# Altium PCB MAGI'sPrototypeBoard.PcbDoc (part 2 of 3)
Units mil, origin at the board's own origin, x right, y up, seen from the top; angles counter-clockwise.
Board outline 6000 x 4000 mil, 2 copper layers (Top Layer, Bottom Layer); 30 components, 124 nets, 1722 pads, 44 vias.
Unrouted connection lines stored in the file: 29.
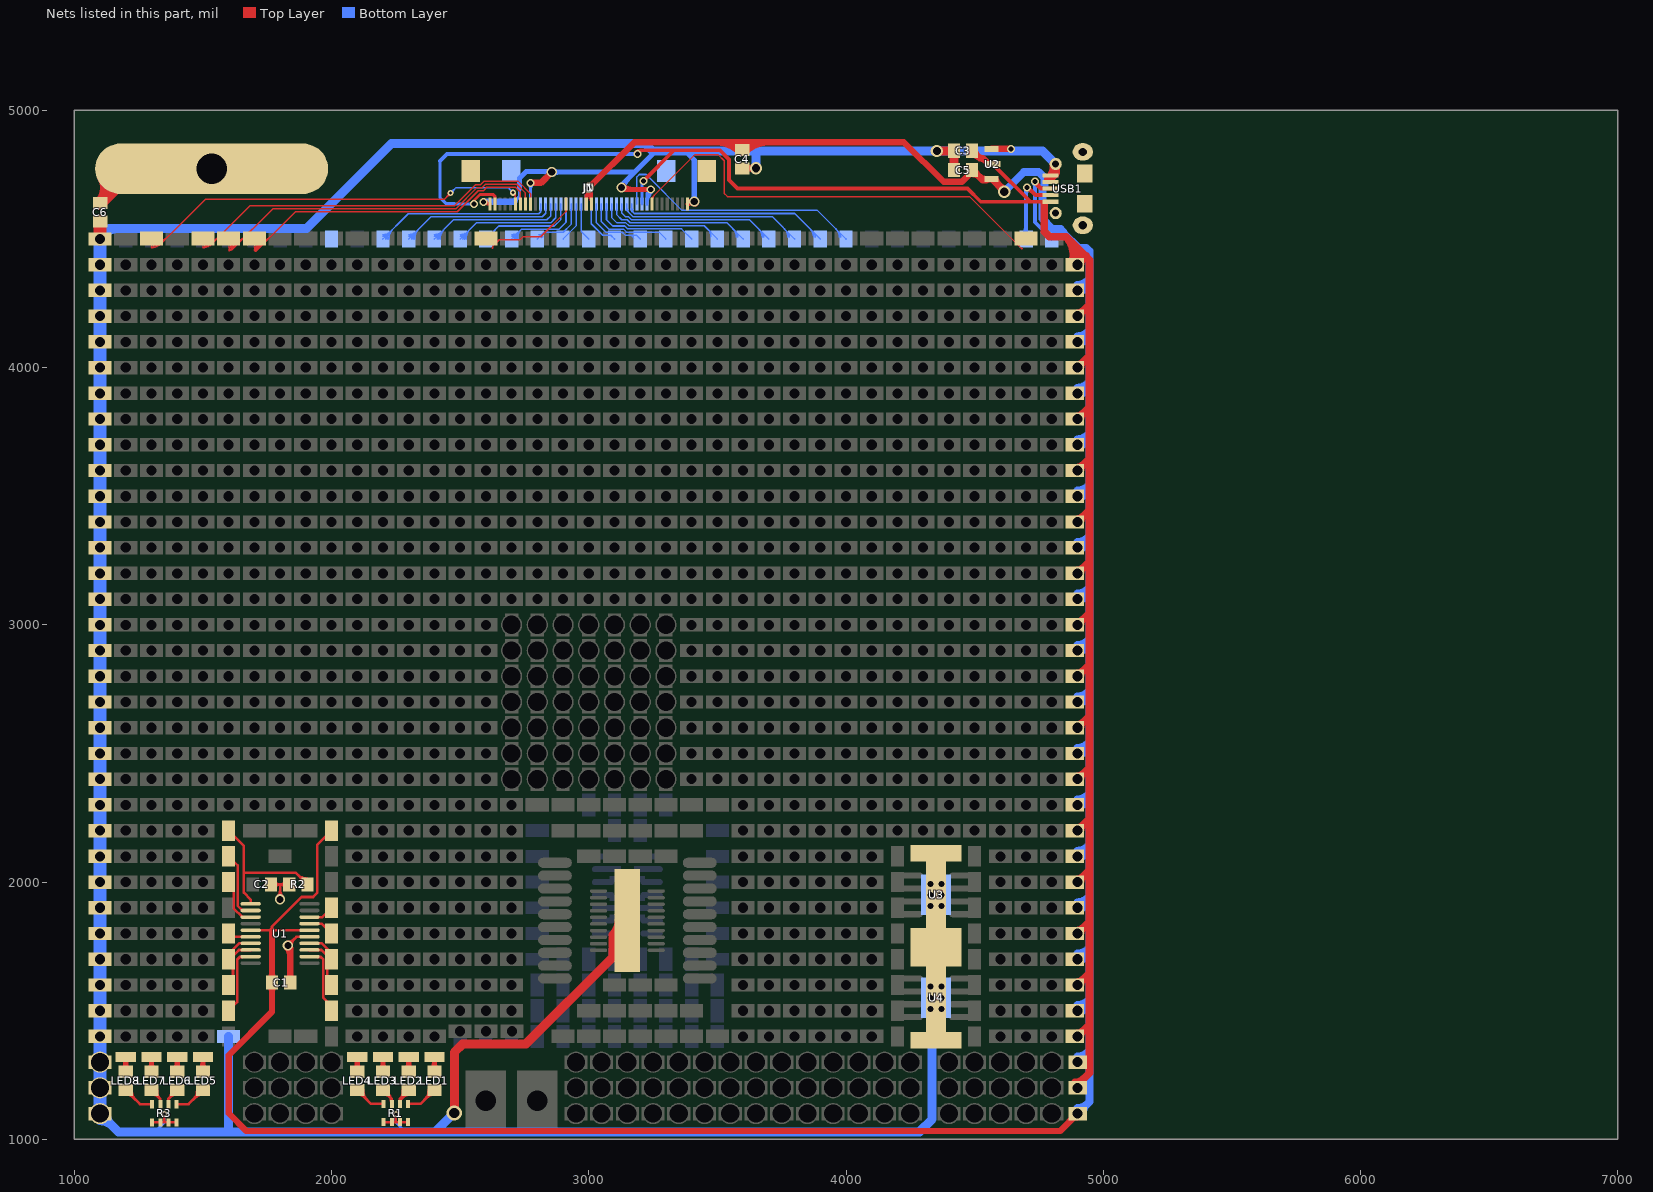
[diagram p2: the nets of this part, all layers, seen from the top]

## Via types
v1: diameter 35.43, hole 23.62, Top Layer to Bottom Layer, tented both sides, 12 vias
v2: diameter 31.5, hole 19.68, Top Layer to Bottom Layer, tented both sides, 9 vias
v3: diameter 24, hole 12, Top Layer to Bottom Layer, tented both sides, 6 vias
v4: diameter 39.37, hole 27.56, Top Layer to Bottom Layer, tented both sides, 6 vias
v5: diameter 59.06, hole 39.37, Top Layer to Bottom Layer, tented both sides, 5 vias
v6: diameter 47.24, hole 39.37, Top Layer to Bottom Layer, 3 vias
v7: diameter 47.24, hole 31.5, Top Layer to Bottom Layer, tented both sides, 3 vias

## Nets (pads, with @x,y where several pads share a name; then routed paths per layer and width w, separated by ;. In a path a pad name is that pad's centre, name@x,y a point inside that pad or via, vN(x,y) a via of type N, cw(c..) or ccw(c..) an arc to the next point about the centre after c; other vN are vias at no path point)
3.3V: C1.1 C4.1 C5.1 J1.20 J1.21 JN.12 pad.40@2000,2200 pad.62@4900,1100 pad.62@4900,1300 pad.63@4900,2500 pad.65@4900,2300 pad.65@4900,4300 pad.67@4900,2100 pad.67@4900,4100 pad.69@4900,1900 pad.69@4900,3900 pad.72@4900,1700 pad.72@4900,3700 pad.74@4900,1500 pad.74@4900,3500 pad.77@4900,3300 pad.78@4900,2700 pad.78@4900,2900 pad.78@4900,3100 U1.5 U1.16 U2.3 | length 14374.1
  Top Layer w10: U1.5@1685.83,1812.8 1742.2,1812.8 1743,1812 1768.5,1812 ; 1768.5,1810 1768.5,1812 ; U1.16@1914.17,1812.8 1913.38,1812 1768.5,1812 ; 1965.86,2165.86 cw(c2000,2131.72) pad.40@2000,2180 ; pad.40@2000,2200 1944,2144 1944,1957.78 1928.22,1942 1883.24,1942 1768.5,1827.27 1768.5,1812
  Top Layer w12: J1.21@2990.16,4636.02 v4@2990.16,4689.16 ; J1.21@2990.16,4642.2 cw(c3056.8,4642.2) v4@3009.68,4689.32 ; 2990.16,4671.17 cw(c3027.83,4671.17) v4@3001.19,4697.81 ; v4@2990.32,4689.32 cw(c2943.2,4642.2) J1.20@3009.84,4642.2 ; v4@2998.81,4697.81 cw(c2972.17,4671.17) 3009.84,4671.17 ; v4(3000,4699) 3009.84,4689.16 J1.20@3009.84,4636.02
  Top Layer w25: C1.1@1760.64,1597.25 cw(c1741.65,1578.27) 1768.5,1578.27 cw(c1795.35,1578.27) C1.1@1776.37,1597.25 ; C1.1@1760.64,1620.86 ccw(c1741.65,1639.84) 1768.5,1639.84 ccw(c1795.35,1639.84) C1.1@1776.37,1620.86 ; 1768.5,1810 C1.1@1768.5,1609.06 1768.5,1495.44 1600,1326.94 1600,1101.32 1669,1032.32 4832.32,1032.32 v6(4900,1100) ; v4(3000,4699) 3177.5,4876.5 4225.07,4876.5 4379.63,4721.94 4450.85,4721.94 4490.43,4761.52 C5.1@4490.43,4768 4526,4732.43 ; 3491.21,4876.5 cw(c3491.21,4743.58) C4.1@3585.2,4837.57 ; 3551.57,4876.5 cw(c3551.57,4803.94) C4.1@3602.88,4855.25 ; C4.1@3591.12,4855.25 cw(c3642.43,4803.94) 3642.43,4876.5 ; C4.1@3608.8,4837.57 cw(c3702.79,4743.58) 3702.79,4876.5 ; C5.1@4469.65,4740.74 ccw(c4446.33,4764.06) C5.1@4479.31,4764.06 ; C5.1@4490.43,4752.94 cw(c4490.43,4716.59) 4516.14,4742.29 ; C5.1@4501.18,4766.94 ccw(c4539.47,4777.2) 4519.65,4742.87 ; C5.1@4509.99,4748.44 ccw(c4550.31,4788.76) U2.3@4550.31,4731.74 ; U2.3@4550.77,4731.93 cw(c4538.65,4745.08) 4526,4732.43 ; U2.3@4581.05,4732.59 ccw(c4647.1,4759.37) v7@4619.33,4693.73 ; U2.3@4581.11,4732.43 ccw(c4617.47,4732.43) 4591.76,4706.73 ; 4586.34,4719.54 ccw(c4624.68,4735.08) v7@4617.05,4694.42 ; v7@4603.88,4683.49 ccw(c4577.03,4683.49) 4596.01,4702.47 ccw(c4615,4721.46) v7@4615,4694.61 ; v7@4615,4679 v7(4615,4683.49) U2.3@4566.06,4732.43 4526,4732.43 ; pad.62@4886.5,1100 cw(c4853.91,1100) 4876.95,1076.95 cw(c4900,1053.91) pad.62@4900,1086.5 ; pad.62@4888.88,1100 cw(c4862.03,1100) 4881.01,1081.01 cw(c4900,1062.03) pad.62@4900,1088.88 ; 4595.57,4702.86 ccw(c4615.29,4722.29) 4615.08,4694.61 cw(c4615.29,4722.29) 4595.57,4702.86 ; 4596.39,4702.03 cw(c4577.86,4683.76) 4603.88,4683.57 ccw(c4577.86,4683.76) 4596.39,4702.03
  Bottom Layer w12: JN.12@2990.16,4636.02 2990.16,4689.16 v4(3000,4699)
  Bottom Layer w30: v7(4615,4683.49) 4691.51,4760 4748,4760 4748.25,4759.75 4750.22,4759.75 4771.75,4738.22 4771.75,4707.78 4763.5,4699.53 4763.5,4579.5 4804.5,4538.5 4834.7,4538.5 4847,4526.2 4847,4522.66 4903.66,4466 4934,4466 4947,4453 4947,4346.3 ; v6(4900,1100) 4900.7,1100 4947,1146.3 4947,1346.3 ; pad.62@4900,1122 ccw(c4900,1176.8) 4938.75,1138.05 ; v6(4900,1300) 4900.7,1300 4947,1346.3 ; pad.62@4900,1322 ccw(c4900,1376.8) 4938.75,1338.05 ; pad.74@4900,1500 4900.7,1500 4947,1546.3 ; pad.74@4900,1522 ccw(c4900,1576.8) 4938.75,1538.05 ; pad.72@4900,1700 4900.7,1700 4947,1746.3 ; pad.72@4900,1722 ccw(c4900,1776.8) 4938.75,1738.05 ; pad.69@4900,1900 4900.7,1900 4947,1946.3 ; pad.69@4900,1922 ccw(c4900,1976.8) 4938.75,1938.05 ; pad.67@4900,2100 4900.7,2100 4947,2146.3 ; pad.67@4900,2122 ccw(c4900,2176.8) 4938.75,2138.05 ; pad.65@4900,2300 4900.7,2300 4947,2346.3 ; pad.65@4900,2322 ccw(c4900,2376.8) 4938.75,2338.05 ; pad.63@4900,2500 4900.7,2500 4947,2546.3 ; pad.63@4900,2522 ccw(c4900,2576.8) 4938.75,2538.05 ; pad.78@4900,2700 4900.7,2700 4947,2746.3 ; pad.78@4900,2722 ccw(c4900,2776.8) 4938.75,2738.05 ; pad.78@4900,2900 4900.7,2900 4947,2946.3 ; pad.78@4900,2922 ccw(c4900,2976.8) 4938.75,2938.05 ; pad.78@4900,3100 4900.7,3100 4947,3146.3 ; pad.78@4900,3122 ccw(c4900,3176.8) 4938.75,3138.05 ; pad.77@4900,3300 4900.7,3300 4947,3346.3 ; pad.77@4900,3322 ccw(c4900,3376.8) 4938.75,3338.05 ; pad.74@4900,3500 4900.7,3500 4947,3546.3 ; pad.74@4900,3522 ccw(c4900,3576.8) 4938.75,3538.05 ; pad.72@4900,3700 4900.7,3700 4947,3746.3 ; pad.72@4900,3722 ccw(c4900,3776.8) 4938.75,3738.05 ; pad.69@4900,3900 4900.7,3900 4947,3946.3 ; pad.69@4900,3922 ccw(c4900,3976.8) 4938.75,3938.05 ; pad.67@4900,4100 4900.7,4100 4947,4146.3 ; pad.67@4900,4122 ccw(c4900,4176.8) 4938.75,4138.05 ; pad.65@4900,4300 4900.7,4300 4947,4346.3 ; pad.65@4900,4322 ccw(c4900,4376.8) 4938.75,4338.05 ; pad.62@4921,1101 cw(c4967.6,1101) pad.62@4934.65,1133.95 ; pad.62@4921,1301 cw(c4967.6,1301) pad.62@4934.65,1333.95 ; pad.74@4921,1501 cw(c4967.6,1501) 4934.65,1533.95 ; pad.72@4921,1701 cw(c4967.6,1701) 4934.65,1733.95 ; pad.69@4921,1901 cw(c4967.6,1901) 4934.65,1933.95 ; pad.67@4921,2101 cw(c4967.6,2101) 4934.65,2133.95 ; pad.65@4921,2301 cw(c4967.6,2301) 4934.65,2333.95 ; pad.63@4921,2501 cw(c4967.6,2501) 4934.65,2533.95 ; pad.78@4921,2701 cw(c4967.6,2701) 4934.65,2733.95 ; pad.78@4921,2901 cw(c4967.6,2901) 4934.65,2933.95 ; pad.78@4921,3101 cw(c4967.6,3101) 4934.65,3133.95 ; pad.77@4921,3301 cw(c4967.6,3301) 4934.65,3333.95 ; pad.74@4921,3501 cw(c4967.6,3501) 4934.65,3533.95 ; pad.72@4921,3701 cw(c4967.6,3701) 4934.65,3733.95 ; pad.69@4921,3901 cw(c4967.6,3901) 4934.65,3933.95 ; pad.67@4921,4101 cw(c4967.6,4101) 4934.65,4133.95 ; pad.65@4921,4301 cw(c4967.6,4301) 4934.65,4333.95 ; 4947,1346.3 4947,1546.3 ; 4947,1546.3 4947,1746.3 ; 4947,1746.3 4947,1946.3 ; 4947,1946.3 4947,2146.3 ; 4947,2146.3 4947,2346.3 ; 4947,2346.3 4947,2546.3 ; 4947,2546.3 4947,2746.3 ; 4947,2746.3 4947,2946.3 ; 4947,2946.3 4947,3146.3 ; 4947,3146.3 4947,3346.3 ; 4947,3346.3 4947,3546.3 ; 4947,3546.3 4947,3746.3 ; 4947,3746.3 4947,3946.3 ; 4947,3946.3 4947,4146.3 ; 4947,4146.3 4947,4346.3
5V: C3.1 J1.39 JN.23 pad.62@4900,1200 pad.62@4900,2600 pad.64@4900,2400 pad.64@4900,4400 pad.66@4900,2200 pad.66@4900,4200 pad.68@4900,2000 pad.68@4900,4000 pad.70@4900,1800 pad.70@4900,3800 pad.73@4900,1600 pad.73@4900,3600 pad.75@4900,1400 pad.75@4900,3400 pad.76@4900,3000 pad.76@4900,3200 pad.78@4900,2800 U2.2 USB1.1 | length 9169
  Top Layer w12: v2@2542.11,4637.89 2576.88,4672.67 2596.65,4672.67 2597.6,4673.61 2627.02,4673.61 2635.83,4664.81 J1.39@2635.83,4636.02
  Top Layer w15: v2@3184.23,4835.77 cw(c3205.98,4814.02) 3205.98,4844.78 ; 3202.78,4844.78 3331.78,4844.78 ; v2(3213,4726) 3331.78,4844.78 ; U2.2@4569.99,4791.49 4716.66,4644.82 ; U2.2@4578.99,4791.49 ccw(c4600.71,4791.49) 4585.35,4776.13 ; USB1.1@4817.48,4644.82 USB1.1@4794.48,4644.82 4716.66,4644.82 ; 3331.78,4844.78 3509.63,4844.78 3545.8,4808.6 3545.8,4729 3578.86,4695.94 4472.62,4695.94 4523.74,4644.82 4716.66,4644.82
  Top Layer w25: C3.1@4490.43,4827.94 cw(c4490.43,4791.59) 4516.14,4817.29 ; C3.1@4490.43,4843 4519.37,4814.06 4532.56,4814.06 ; C3.1@4501.43,4840.76 ccw(c4532.55,4845.55) 4532.55,4814.06 ; 4519.38,4814.06 cw(c4519.38,4780.57) U2.2@4550.96,4791.72 ; U2.2@4569.99,4791.49 4555.13,4791.49 4532.56,4814.06
  Top Layer w30: USB1.1@4770.53,4638 4770.53,4528.97 4791,4508.5 4855.5,4508.5 ; pad.64@4879.47,4413.17 ccw(c4787.81,4440.8) 4855.5,4508.5 ; pad.62@4890,1221 ccw(c4890,1267.26) 4922.71,1234.55 ; 4890.96,4473.04 cw(c4842.31,4424.38) pad.64@4908.19,4404.52 ; v6(4900,1200) 4900,1211.84 4947,1258.84 4947,1447 ; pad.75@4900,1400 4947,1447 ; pad.75@4900,1411 ccw(c4900,1437.56) 4918.78,1418.78 ccw(c4937.56,1400) pad.75@4911,1400 ; pad.73@4900,1600 4947,1647 ; pad.73@4900,1611 ccw(c4900,1637.56) 4918.78,1618.78 ccw(c4937.56,1600) pad.73@4911,1600 ; pad.70@4900,1800 4947,1847 ; pad.70@4900,1811 ccw(c4900,1837.56) 4918.78,1818.78 ccw(c4937.56,1800) pad.70@4911,1800 ; pad.68@4900,2000 4947,2047 ; pad.68@4900,2011 ccw(c4900,2037.56) 4918.78,2018.78 ccw(c4937.56,2000) pad.68@4911,2000 ; pad.66@4900,2200 4947,2247 ; pad.66@4900,2211 ccw(c4900,2237.56) 4918.78,2218.78 ccw(c4937.56,2200) pad.66@4911,2200 ; pad.64@4900,2400 4947,2447 ; pad.64@4900,2411 ccw(c4900,2437.56) 4918.78,2418.78 ccw(c4937.56,2400) pad.64@4911,2400 ; pad.62@4900,2600 4947,2647 ; pad.62@4900,2611 ccw(c4900,2637.56) 4918.78,2618.78 ccw(c4937.56,2600) pad.62@4911,2600 ; pad.78@4900,2800 4947,2847 ; pad.78@4900,2811 ccw(c4900,2837.56) 4918.78,2818.78 ccw(c4937.56,2800) pad.78@4911,2800 ; pad.76@4900,3000 4947,3047 ; pad.76@4900,3011 ccw(c4900,3037.56) 4918.78,3018.78 ccw(c4937.56,3000) pad.76@4911,3000 ; pad.76@4900,3200 4947,3247 ; pad.76@4900,3211 ccw(c4900,3237.56) 4918.78,3218.78 ccw(c4937.56,3200) pad.76@4911,3200 ; pad.75@4900,3400 4947,3447 ; pad.75@4900,3411 ccw(c4900,3437.56) 4918.78,3418.78 ccw(c4937.56,3400) pad.75@4911,3400 ; pad.73@4900,3600 4947,3647 ; pad.73@4900,3611 ccw(c4900,3637.56) 4918.78,3618.78 ccw(c4937.56,3600) pad.73@4911,3600 ; pad.70@4900,3800 4947,3847 ; pad.70@4900,3811 ccw(c4900,3837.56) 4918.78,3818.78 ccw(c4937.56,3800) pad.70@4911,3800 ; pad.68@4900,4000 4947,4047 ; pad.68@4900,4011 ccw(c4900,4037.56) 4918.78,4018.78 ccw(c4937.56,4000) pad.68@4911,4000 ; pad.66@4900,4200 4947,4247 ; pad.66@4900,4211 ccw(c4900,4237.56) 4918.78,4218.78 ccw(c4937.56,4200) pad.66@4911,4200 ; pad.64@4900,4400 4934.09,4434.09 ; pad.64@4900,4411 ccw(c4900,4437.56) 4918.78,4418.78 ccw(c4937.56,4400) pad.64@4911,4400 ; 4855.5,4508.5 4947,4417 4947,4247 ; 4947,1447 4947,1647 ; 4947,1647 4947,1847 ; 4947,1847 4947,2047 ; 4947,2047 4947,2247 ; 4947,2247 4947,2447 ; 4947,2447 4947,2647 ; 4947,2647 4947,2847 ; 4947,2847 4947,3047 ; 4947,3047 4947,3247 ; 4947,3247 4947,3447 ; 4947,3447 4947,3647 ; 4947,3647 4947,3847 ; 4947,3847 4947,4047 ; 4947,4047 4947,4247
  Bottom Layer w12: 2421,4803 2421,4661.6 2445.6,4637 2478.6,4637 2479.6,4636 v2(2554,4636) ; JN.23@3206.69,4636.02 3206.69,4719.69 v2(3213,4726)
  Bottom Layer w15: 2421,4803 2449,4831 v2(3189,4831)
A0: JN.7 pad.44 pad.62@2600,4500 U1.14 | length 669.3
  Top Layer w10: U1.14@1914.17,1761.61 1962.39,1761.61 2000,1724 pad.44@2000,1700
  Bottom Layer w6: pad.62@2600,4500 2650.5,4550.5 2866,4550.5 2891.73,4576.23 JN.7@2891.73,4636.02 ; pad.62@2600,4511 ccw(c2600,4537.56) 2618.78,4518.78 ccw(c2637.56,4500) pad.62@2611,4500 ; pad.62@2600,4517 ccw(c2600,4558.04) 2629.02,4529.02 ccw(c2658.04,4500) pad.62@2617,4500 ; pad.62@2623,4500 cw(c2678.53,4500) 2639.26,4539.26 ; JN.7@2889.68,4614.28 cw(c2884.72,4609.32) 2891.73,4609.32 cw(c2898.75,4609.32) JN.7@2893.79,4614.28
A1: JN.6 pad.62@2500,4500 | length 620.5
  Bottom Layer w6: pad.62@2500,4500 2562.5,4562.5 2852,4562.5 2872.05,4582.55 JN.6@2872.05,4636.02 ; pad.62@2500,4511 ccw(c2500,4537.56) 2518.78,4518.78 ccw(c2537.56,4500) pad.62@2511,4500 ; pad.62@2500,4517 ccw(c2500,4558.04) 2529.02,4529.02 ccw(c2558.04,4500) pad.62@2517,4500 ; pad.62@2523,4500 cw(c2578.53,4500) 2539.26,4539.26 ; JN.6@2869.99,4614.28 cw(c2865.03,4609.32) 2872.05,4609.32 cw(c2879.06,4609.32) JN.6@2874.1,4614.28
A2: JN.5 pad.62@2400,4500 | length 696.6
  Bottom Layer w6: pad.62@2400,4500 2474.5,4574.5 2837,4574.5 2852.36,4589.86 JN.5@2852.36,4636.02 ; pad.62@2400,4511 ccw(c2400,4537.56) 2418.78,4518.78 ccw(c2437.56,4500) pad.62@2411,4500 ; pad.62@2400,4517 ccw(c2400,4558.04) 2429.02,4529.02 ccw(c2458.04,4500) pad.62@2417,4500 ; pad.62@2423,4500 cw(c2478.53,4500) 2439.26,4539.26 ; JN.5@2850.31,4614.28 cw(c2845.35,4609.32) 2852.36,4609.32 cw(c2859.38,4609.32) JN.5@2854.42,4614.28
A3: pad.62@2000,4500
A4: JN.4 pad.42 pad.62@2300,4500 U1.18 | length 909.5
  Top Layer w10: U1.18@1914.17,1863.98 1963.98,1863.98 pad.42@2000,1900 ; 1965.86,1865.86 cw(c2000,1831.72) pad.42@2000,1880
  Bottom Layer w6: pad.62@2300,4500 2386.5,4586.5 2819,4586.5 2832.68,4600.18 JN.4@2832.68,4636.02 ; pad.62@2300,4511 ccw(c2300,4537.56) 2318.78,4518.78 ccw(c2337.56,4500) pad.62@2311,4500 ; pad.62@2300,4517 ccw(c2300,4558.04) 2329.02,4529.02 ccw(c2358.04,4500) pad.62@2317,4500 ; pad.62@2323,4500 cw(c2378.53,4500) 2339.26,4539.26 ; JN.4@2830.62,4614.28 cw(c2825.66,4609.32) 2832.68,4609.32 cw(c2839.69,4609.32) JN.4@2834.73,4614.28
A5: JN.3 pad.43 pad.62@2200,4500 U1.17 | length 987.7
  Top Layer w10: U1.17@1914.17,1838.39 1961.61,1838.39 pad.43@2000,1800 ; 1965.86,1834.14 ccw(c2000,1868.28) pad.43@2000,1820
  Bottom Layer w6: pad.62@2200,4500 2298.5,4598.5 2806,4598.5 2812.99,4605.49 JN.3@2812.99,4636.02 ; pad.62@2200,4511 ccw(c2200,4537.56) 2218.78,4518.78 ccw(c2237.56,4500) pad.62@2211,4500 ; pad.62@2200,4517 ccw(c2200,4558.04) 2229.02,4529.02 ccw(c2258.04,4500) pad.62@2217,4500 ; pad.62@2223,4500 cw(c2278.53,4500) 2239.26,4539.26 ; JN.3@2810.94,4614.28 cw(c2805.98,4609.32) 2812.99,4609.32 cw(c2820.01,4609.32) JN.3@2815.05,4614.28
A6: 
BOOT0: J1.35 pad.31 pad.62@1300,4502 R2.2 U1.1 | length 2558.7
  Top Layer w6: 1300,4466.5 ccw(c1300,4517.86) pad.62@1336.31,4481.54 ; 1300,4472.5 ccw(c1300,4538.34) 1346.56,4491.78 ; pad.62@1300,4478.5 ccw(c1300,4558.83) 1356.8,4502.03 ; pad.62@1300,4484.5 ccw(c1300,4579.31) 1367.04,4512.27 ; pad.62@1327,4475 1327,4476 1330.77,4476 1508.77,4654 2438,4654 v3(2463,4679) ; v3@2454,4679 cw(c2432.27,4679) 2447.64,4663.64 cw(c2463,4648.27) v3@2463,4670 ; v3(2706,4680) 2714.57,4671.43 ; v3@2710.25,4672.07 cw(c2711.98,4668.84) 2714.57,4671.43 ; J1.35@2712.51,4657.76 ccw(c2707.55,4662.72) 2714.57,4662.72 ccw(c2721.58,4662.72) J1.35@2716.62,4657.76 ; v3@2713.93,4675.75 ccw(c2717.16,4674.02) 2714.57,4671.43 ; J1.35@2714.57,4636.02 2714.57,4671.43
  Top Layer w10: pad.31@1600,2200 1659.08,2140.92 1659.08,2039 ; U1.1@1685.83,1915.16 1685.83,1932.08 1659.08,1958.83 1659.08,2036 1861.24,2036 R2.2@1906.3,1990.94 ; 1867.79,2029.46 ccw(c1906.3,2067.97) R2.2@1906.3,2013.5 ; 1877.29,2019.95 cw(c1852.22,1994.88) R2.2@1887.68,1994.88 ; R2.2@1884.86,2012.38 ccw(c1906.3,2033.82) R2.2@1906.3,2003.5
  Bottom Layer w6: v3(2463,4679) 2484,4700 2686,4700 v3(2706,4680) ; v3@2463,4688 ccw(c2463,4709.73) 2478.36,4694.36 ccw(c2493.73,4679) v3@2472,4679 ; v3@2697,4680 ccw(c2675.27,4680) 2690.64,4695.36 ccw(c2706,4710.73) v3@2706,4689
D0: JN.22 pad.38 pad.62@4000,4500 U1.9 | length 1390.5
  Top Layer w10: pad.38@1600,1500 1633,1533 1633,1699 1644.43,1710.43 U1.9@1685.83,1710.43 ; 1634.9,1700.9 cw(c1653.35,1682.46) U1.9@1653.35,1708.54
  Bottom Layer w6: JN.22@3184.95,4657.76 ccw(c3179.99,4662.72) 3187.01,4662.72 ccw(c3194.02,4662.72) JN.22@3189.06,4657.76 ; JN.22@3187.01,4636.02 3187.01,4741.27 3196.48,4750.75 3223.25,4750.75 3237.75,4736.25 3237.75,4735.94 3362.69,4611 3889,4611 pad.62@4000,4500 ; 3960.21,4539.79 cw(c3926.92,4506.5) pad.62@3974,4506.5 ; 3970.45,4529.55 cw(c3947.41,4506.5) pad.62@3980,4506.5
D1: JN.21 pad.37 pad.62@3900,4500 U1.8 | length 1106.1
  Top Layer w10: pad.37@1600,1600 1617,1617 1617,1713 1640.02,1736.02 U1.8@1685.83,1736.02
  Bottom Layer w6: JN.21@3164.25,4616.73 ccw(c3175.05,4615.37) 3167.36,4607.67 ; JN.21@3165.27,4614.28 cw(c3160.31,4609.32) 3167.32,4609.32 cw(c3174.34,4609.32) JN.21@3169.38,4614.28 ; JN.21@3167.32,4636.02 3167.32,4607.7 3176.02,4599 ; JN.21@3170.2,4615.98 ccw(c3190.45,4613.43) 3176.02,4599 ; 3860.21,4539.79 cw(c3826.92,4506.5) pad.62@3874,4506.5 ; 3870.45,4529.55 cw(c3847.41,4506.5) pad.62@3880,4506.5 ; pad.62@3900,4500 3801,4599 3176.02,4599
D2: JN.20 pad.36 pad.62@3800,4500 U1.7 | length 935
  Top Layer w10: pad.36@1600,1700 1600,1721 1640.61,1761.61 U1.7@1685.83,1761.61
  Bottom Layer w6: JN.20@3145.86,4614.04 cw(c3143.05,4610.41) 3147.64,4610.41 ; JN.20@3147.64,4636.02 3147.64,4610.41 ; JN.20@3149.42,4614.04 ccw(c3152.22,4610.41) 3147.64,4610.41 ; JN.20@3150.54,4616.34 ccw(c3171.86,4616.34) 3156.79,4601.26 ; 3760.21,4539.79 cw(c3726.92,4506.5) pad.62@3774,4506.5 ; 3770.45,4529.55 cw(c3747.41,4506.5) pad.62@3780,4506.5 ; pad.62@3800,4500 3713,4587 3171.05,4587 3147.64,4610.41
D3: JN.19 pad.35 pad.62@3700,4500 U1.6 | length 813.6
  Top Layer w10: pad.35@1600,1800 1612.8,1787.2 U1.6@1685.83,1787.2
  Bottom Layer w6: JN.19@3125.9,4614.28 cw(c3120.94,4609.32) 3127.95,4609.32 cw(c3134.97,4609.32) JN.19@3130.01,4614.28 ; JN.19@3127.95,4636.02 3127.95,4601.05 3142.5,4586.5 3154.58,4586.5 3166.08,4575 3625,4575 pad.62@3700,4500 ; 3660.21,4539.79 cw(c3626.92,4506.5) pad.62@3674,4506.5 ; 3670.45,4529.55 cw(c3647.41,4506.5) pad.62@3680,4506.5
D4: JN.18 pad.62@3600,4500 | length 645.9
  Bottom Layer w6: JN.18@3106.21,4614.28 cw(c3101.25,4609.32) 3108.27,4609.32 cw(c3115.28,4609.32) JN.18@3110.32,4614.28 ; JN.18@3108.27,4636.02 3108.27,4594.73 3128.5,4574.5 3149.61,4574.5 3161.11,4563 3537,4563 pad.62@3600,4500 ; 3560.21,4539.79 cw(c3526.92,4506.5) pad.62@3574,4506.5 ; 3570.45,4529.55 cw(c3547.41,4506.5) pad.62@3580,4506.5
D5: JN.17 pad.62@3500,4500 | length 538.1
  Bottom Layer w6: JN.17@3086.53,4614.28 cw(c3081.57,4609.32) 3088.58,4609.32 cw(c3095.6,4609.32) JN.17@3090.64,4614.28 ; JN.17@3088.58,4636.02 3088.58,4583.42 3109.5,4562.5 3144.64,4562.5 3156.14,4551 3449,4551 pad.62@3500,4500 ; 3465.65,4534.35 cw(c3444.26,4512.96) pad.62@3474.14,4508.22
D6: JN.16 pad.62@3400,4500 | length 434.2
  Bottom Layer w6: JN.16@3066.84,4614.28 cw(c3061.88,4609.32) 3068.9,4609.32 cw(c3075.91,4609.32) JN.16@3070.95,4614.28 ; JN.16@3068.9,4636.02 3068.9,4575.1 3093.5,4550.5 3139.67,4550.5 3151.17,4539 3361,4539 pad.62@3400,4500
D7: JN.15 pad.62@3300,4500 | length 358.7
  Bottom Layer w6: JN.15@3047.16,4614.28 cw(c3042.2,4609.32) 3049.21,4609.32 cw(c3056.23,4609.32) JN.15@3051.27,4614.28 ; JN.15@3049.21,4636.02 3049.21,4566.79 3077.5,4538.5 3134.7,4538.5 3146.2,4527 3273,4527 pad.62@3300,4500
D8: JN.14 pad.62@3200,4500 | length 301.7
  Bottom Layer w6: JN.14@3027.47,4614.28 cw(c3022.51,4609.32) 3029.53,4609.32 cw(c3036.54,4609.32) JN.14@3031.58,4614.28 ; JN.14@3029.53,4636.02 3029.53,4564.47 3067.5,4526.5 3129.73,4526.5 3141.23,4515 3185,4515 pad.62@3200,4500 ; 3157.9,4515 cw(c3157.9,4497.42) pad.62@3174.57,4503.01
D9: JN.13 pad.62@3100,4500 | length 202.5
  Bottom Layer w6: JN.13@3007.79,4614.28 cw(c3002.83,4609.32) 3009.84,4609.32 cw(c3016.86,4609.32) JN.13@3011.9,4614.28 ; JN.13@3009.84,4636.02 3009.84,4559.19 3054.53,4514.5 3085.5,4514.5 pad.62@3100,4500
D10: JN.11 pad.62@3000,4500 | length 159.3
  Bottom Layer w6: JN.11@2968.42,4614.28 cw(c2963.46,4609.32) 2970.47,4609.32 cw(c2977.49,4609.32) JN.11@2972.53,4614.28 ; JN.11@2970.47,4636.02 2970.47,4529.53 pad.62@3000,4500
D11: JN.10 pad.62@2900,4500 | length 168.1
  Bottom Layer w6: pad.62@2900,4500 2950.79,4550.79 JN.10@2950.79,4636.02 ; JN.10@2948.73,4614.28 cw(c2943.77,4609.32) 2950.79,4609.32 cw(c2957.8,4609.32) JN.10@2952.84,4614.28
D12: JN.9 pad.62@2800,4500 | length 296.9
  Bottom Layer w6: pad.62@2800,4500 2826.5,4526.5 ; pad.62@2805.28,4516.16 ccw(c2809.64,4529.53) 2819.59,4519.59 ccw(c2829.53,4509.64) pad.62@2816.16,4505.28 ; pad.62@2821.86,4507.14 cw(c2839.96,4513.04) 2826.5,4526.5 ; JN.9@2929.05,4614.28 cw(c2924.09,4609.32) 2931.1,4609.32 cw(c2938.12,4609.32) JN.9@2933.16,4614.28 ; JN.9@2931.1,4636.02 2931.1,4556.6 2901,4526.5 2826.5,4526.5
D13: JN.8 pad.62@2700,4500 | length 465.8
  Bottom Layer w6: pad.62@2700,4500 2738.5,4538.5 ; pad.62@2700.15,4511 ccw(c2700.51,4536.32) 2718.41,4518.41 ccw(c2736.32,4500.51) pad.62@2711,4500.15 ; pad.62@2700.24,4517 ccw(c2700.79,4556.12) 2728.46,4528.46 ccw(c2756.12,4500.79) pad.62@2717,4500.24 ; pad.62@2723,4500.32 cw(c2775.93,4501.06) 2738.5,4538.5 ; JN.8@2909.36,4614.28 cw(c2904.4,4609.32) 2911.42,4609.32 cw(c2918.43,4609.32) JN.8@2913.47,4614.28 ; JN.8@2911.42,4636.02 2911.42,4564.92 2885,4538.5 2738.5,4538.5
D14: 
DM: pad.62@4700,4500 USB1.2 | length 407.8
  Top Layer w15: v2@4703,4691.75 cw(c4703,4662.18) 4723.91,4683.09 ; v2@4715,4692 4736.59,4670.41 USB1.2@4817.48,4670.41
  Bottom Layer w15: pad.62@4682.53,4508.97 ccw(c4640.34,4551.16) 4700,4551.16 ; pad.62@4700,4500 4700,4697 v2@4704,4701 ; 4700,4672.84 cw(c4730.16,4672.84) v2@4708.83,4694.17
  other v2: 4703,4700
DP: pad.62@4800,4500 USB1.3 | length 422.6
  Top Layer w15: v2@4743,4719 4743,4710 4757,4696 USB1.3@4817.48,4696 ; v2@4743.25,4723 ccw(c4775.23,4723) 4752.62,4700.38 ; 4746.56,4706.44 ccw(c4770.86,4730.73) USB1.3@4770.86,4696.37
  Bottom Layer w15: v2@4729.17,4717.17 cw(c4715.09,4703.09) 4735,4703.09 cw(c4754.91,4703.09) v2@4740.83,4717.17 ; v2(4735,4723) 4735,4565 pad.62@4800,4500
GND: C1.2 C2.1 C3.2 C4.2 C5.2 C6.2 J1.1 J1.40 J1.41 J1.42 JN.1 JN.24 JN.25 JN.26 pad.6@1100,1100 pad.6@1100,1200 pad.6@1100,1300 pad.14 pad.62@1100,1100 pad.62@1100,1200 pad.62@1100,1300 pad.62@1100,2600 pad.62@1100,4500 pad.63@1100,2500 pad.64@1100,2400 pad.64@1100,4400 pad.64@4350,2112 pad.65@1100,2300 pad.65@1100,4300 pad.65@4350,1783 pad.66@1100,2200 pad.66@1100,4200 pad.66@4350,1712 pad.67@1100,2100 pad.67@1100,4100 pad.68@1100,2000 pad.68@1100,4000 pad.68@4350,1385 pad.69@1100,1900 pad.69@1100,3900 pad.69@4350,1950 pad.70@1100,1800 pad.70@1100,3800 pad.70@4350,1550 pad.72@1100,1700 pad.72@1100,3700 pad.73@1100,1600 pad.73@1100,3600 pad.74@1100,1500 pad.74@1100,3500 pad.75@1100,1400 pad.75@1100,3400 pad.76@1100,3000 pad.76@1100,3200 pad.77@1100,3300 pad.78@1100,2700 pad.78@1100,2800 pad.78@1100,2900 pad.78@1100,3100 pad.79@1600,1400 R1.5 R1.6 R1.7 R1.8 R2.1 R3.5 R3.6 R3.7 R3.8 U1.15 U2.1 U3.9 U4.9 USB1.0 USB1.4 USB1.5 | length 17892.6
  Top Layer w10: R3.5@1302.76,1065.57 R3.6@1334.25,1065.57 1350,1065.57 ; v3@1345.05,1094.05 cw(c1333.1,1082.1) 1350,1082.1 cw(c1366.9,1082.1) v3@1354.95,1094.05 ; v3(1350,1099) 1350,1065.57 ; R3.8@1397.24,1065.57 R3.7@1365.75,1065.57 1350,1065.57 ; C2.1@1764.57,1990.94 1800,1990.94 ; C2.1@1779.9,1980.38 cw(c1800,1966.55) 1800,1990.94 ; C2.1@1779.9,2001.51 ccw(c1800,2015.34) 1800,1990.94 ; v4@1789.62,1943.38 ccw(c1764.55,1968.45) 1800,1968.45 ccw(c1835.45,1968.45) v4@1810.38,1943.38 ; v4(1800,1933) 1800,1990.94 ; R2.1@1820.1,1980.38 ccw(c1800,1966.55) 1800,1990.94 ; R2.1@1820.1,2001.51 cw(c1800,2015.34) 1800,1990.94 ; v4@1830,1767.68 ccw(c1830,1800.72) 1853.36,1777.36 ; R2.1@1835.43,1990.94 1800,1990.94 ; v4@1839.37,1753 1839.37,1763.37 1863.2,1787.2 U1.15@1914.17,1787.2 ; v4@1844.68,1753 cw(c1882.55,1753) 1855.78,1779.78 ; R1.5@2202.76,1066.57 R1.6@2234.25,1066.57 2249,1066.57 ; v3@2245.05,1094.05 cw(c2233.1,1082.1) 2250,1082.1 cw(c2266.9,1082.1) v3@2254.95,1094.05 ; v3@2250,1102 v3(2250,1099) 2250,1066.57 R1.7@2265.75,1066.57 R1.8@2297.24,1066.57
  Top Layer w12: v2@2600.18,4647.28 ccw(c2616.14,4652.97) J1.40@2616.14,4636.02 2604.98,4636.02 ; J1.1@3383.86,4636.02 J1.1@3386.08,4636.02
  Top Layer w20: v4(3127,4700) 3134,4693 v2(3241,4693) ; v4@3133.85,4706.85 ccw(c3167.28,4740.28) 3167.28,4693 ; v4@3404.67,4637.91 ccw(c3396.53,4625.57) 3386.08,4636.02 3396.06,4646 v4(3410,4646) ; v4@3410,4636.02 v4@3416.34,4636.02 ; C4.2@3597,4774.57 3649.57,4774.57 v7(3650,4775) ; C4.2@3610.57,4764.93 cw(c3633.82,4741.68) 3633.82,4774.57 cw(c3633.82,4807.45) C4.2@3610.57,4784.2 ; C4.2@3616.07,4774.57 ccw(c3616.07,4808.93) v7@3640.37,4784.63 ; C4.2@3618.16,4774.57 cw(c3618.16,4743.16) v7@3640.37,4765.37 ; C4.2@3623.69,4771.85 cw(c3627.53,4757.5) v7@3639.25,4766.63 ; 3625.09,4776.91 ccw(c3628.2,4788.54) v7@3638.43,4782.19 ; 3626.05,4772.48 ccw(c3620.86,4791.82) v7@3638.2,4781.81
  Top Layer w25: v4@1824.92,1747.92 cw(c1790.03,1713.03) 1839.37,1713.03 ; v4(1830,1753) 1839.37,1743.63 C1.2@1839.37,1609.06 ; C1.2@1831.51,1620.86 ccw(c1812.52,1639.84) 1839.37,1639.84 ccw(c1866.22,1639.84) C1.2@1847.23,1620.86 ; v2(2774,4718) 2814,4718 v4(2856,4760) ; U2.1@4566.06,4850.54 4640.46,4850.54 v2(4641,4850)
  Top Layer w35: v5(2477.25,1102.75) 2477.25,1337.75 2510,1370.5 2755.73,1370.5 3094.76,1709.53 3094.76,1794.76 pad.14@3150,1850 ; pad.14@3118.29,1850 cw(c3041.73,1850) 3095.86,1795.86 cw(c3150,1741.73) pad.14@3150,1818.29 ; v7(4353,4842) 4418.57,4842 C3.2@4419.57,4843 C5.2@4419.57,4768 ; USB1.0@4809.06,4790.81 cw(c4736.12,4782.89) 4788,4731 4815.15,4758.15 USB1.0@4815.15,4791.47
  Top Layer w50: pad.62@1100,4500 1100,4567.57 C6.2@1101,4568.57
  Bottom Layer w10: 1312.5,1028.5 1350,1066 v3(1350,1099) ; v3@1345.05,1094.05 cw(c1333.1,1082.1) 1350,1082.1 cw(c1366.9,1082.1) v3@1354.95,1094.05 ; v3@2245.05,1094.05 cw(c2233.1,1082.1) 2250,1082.1 cw(c2266.9,1082.1) v3@2254.95,1094.05 ; v3(2250,1099) 2250,1066 2287.5,1028.5 2300,1016
  Bottom Layer w12: 2707.59,4644 2709.75,4644 2730,4664.25 2730,4695.35 ; v2@2767.11,4711.11 cw(c2751.38,4695.38) 2773.62,4695.38 ; JN.1@2773.62,4636.02 2773.62,4709.62 2774,4710 v2(2774,4718) ; 2773.62,4693.55 cw(c2798.45,4693.55) v2@2780.89,4711.11 ; JN.24@3226.38,4634.18 cw(c3299.8,4634.18) v2@3247.89,4686.11 ; JN.24@3226.38,4636.02 3226.38,4678.38 v2(3241,4693) ; 3226.38,4663.14 cw(c3270.85,4663.14) v2@3239.41,4694.59
  Bottom Layer w20: 2730.25,4695.35 2730.25,4736.12 2755.88,4761.75 2854.25,4761.75 v4(2856,4760) 3178.87,4760 ; 2828.4,4761.75 cw(c2828.4,4732.4) v4@2849.15,4753.15 ; v4@2862.85,4753.15 cw(c2879.38,4736.62) 2879.38,4760 cw(c2879.38,4783.38) v4@2862.85,4766.85 ; v4(3127,4700) 3127,4708.13 3178.87,4760 ; v4@3136.68,4700 cw(c3179.7,4700) 3149.28,4730.42 ; v4@3403.15,4652.85 ccw(c3386.62,4669.38) 3410,4669.38 ccw(c3433.38,4669.38) v4@3416.85,4652.85 ; v4(3410,4646) 3410,4807.28 3382,4835.28 ; 4303.9,4835.28 ccw(c4303.9,4891.1) v7@4343.37,4851.63 ; v7@4353,4835.28 3650,4835.28 3382,4835.28 ; 3178.87,4760 3254.15,4835.28 3382,4835.28
  Bottom Layer w25: v2(2591,4644) 2707.59,4644 2713.09,4649.5
  Bottom Layer w35: pad.6@1100,1072.5 cw(c1100,1006.11) 1146.95,1053.05 ; pad.6@1100,1076.16 cw(c1100,1018.61) 1140.7,1059.3 cw(c1181.39,1100) pad.6@1123.84,1100 ; pad.6@1100,1100 1171.5,1028.5 1312.5,1028.5 1600,1028.5 ; pad.62@1101.1,4527.43 ccw(c1107.27,4574.73) 1141,4541 ; pad.62@1106.01,4512.99 cw(c1173.63,4445.37) 1173.63,4541 ; pad.62@1108.14,4516.56 cw(c1141,4506.69) 1141,4541 ; pad.62@1109.5,4509.5 1141,4541 ; pad.79@1600,1400 1600,1028.5 ; v5(2477.25,1102.75) 2403,1028.5 ; v7(3650,4775) 3650,4835.28 ; 4349,1437 4335.16,1423.16 4335.16,1078.16 4285.5,1028.5 2403,1028.5 ; USB1.0@4815.15,4791.47 4763.84,4842.78 3251.04,4842.78 3248.85,4840.59 3218.93,4870.5 2233,4870.5 1903.5,4541 1141,4541 ; 1600,1028.5 2287.5,1028.5 2403,1028.5
  Bottom Layer w50: pad.6@1100,1100 pad.6@1100,1200 pad.6@1100,1300 pad.75@1100,1400 pad.74@1100,1500 pad.73@1100,1600 pad.72@1100,1700 pad.70@1100,1800 pad.69@1100,1900 pad.68@1100,2000 pad.67@1100,2100 pad.66@1100,2200 pad.65@1100,2300 pad.64@1100,2400 pad.63@1100,2500 pad.62@1100,2600 pad.78@1100,2700 pad.78@1100,2800 pad.78@1100,2900 pad.76@1100,3000 pad.78@1100,3100 pad.76@1100,3200 pad.77@1100,3300 pad.75@1100,3400 pad.74@1100,3500 pad.73@1100,3600 pad.72@1100,3700 pad.70@1100,3800 pad.69@1100,3900 pad.68@1100,4000 pad.67@1100,4100 pad.66@1100,4200 pad.65@1100,4300 pad.64@1100,4400 pad.62@1100,4500 1100,4506.98 pad.62@1106.01,4512.99
  other v1: 4328.35,1506.69 4371.65,1506.69 4328.35,1550 4371.65,1550 4328.35,1593.31 4371.65,1593.31 4328.35,1906.69 4371.65,1906.69 4328.35,1950 4371.65,1950 4328.35,1993.31 4371.65,1993.31
Hole: C6.1 pad.164 | length 595
  Top Layer w50: pad.164@1115.2,4737.86 cw(c1042.3,4698.14) C6.1@1101,4639.43 1234.57,4773 pad.164@1534,4773
LED1: LED1.1 pad.30 | length 109.2
  Top Layer w20: LED1.1@2390.37,1272.07 ccw(c2367.11,1295.32) 2400,1295.32 ccw(c2432.89,1295.32) LED1.1@2409.63,1272.07 ; LED1.1@2400,1262.43 pad.30@2400,1320
LED2: LED2.1 pad.29 | length 109.2
  Top Layer w20: LED2.1@2290.37,1272.07 ccw(c2267.11,1295.32) 2300,1295.32 ccw(c2332.89,1295.32) LED2.1@2309.63,1272.07 ; LED2.1@2300,1262.43 pad.29@2300,1320
LED3: LED3.1 pad.28 | length 109.2
  Top Layer w20: LED3.1@2190.37,1272.07 ccw(c2167.11,1295.32) 2200,1295.32 ccw(c2232.89,1295.32) LED3.1@2209.63,1272.07 ; LED3.1@2200,1262.43 pad.28@2200,1320
LED4: LED4.1 pad.27 | length 109.2
  Top Layer w20: LED4.1@2090.37,1272.07 ccw(c2067.11,1295.32) 2100,1295.32 ccw(c2132.89,1295.32) LED4.1@2109.63,1272.07 ; LED4.1@2100,1262.43 pad.27@2100,1320
LED5: LED5.1 pad.26 | length 109.2
  Top Layer w20: LED5.1@1490.37,1272.07 ccw(c1467.11,1295.32) 1500,1295.32 ccw(c1532.89,1295.32) LED5.1@1509.63,1272.07 ; LED5.1@1500,1262.43 pad.26@1500,1320
LED6: LED6.1 pad.25 | length 109.2
  Top Layer w20: LED6.1@1390.37,1272.07 ccw(c1367.11,1295.32) 1400,1295.32 ccw(c1432.89,1295.32) LED6.1@1409.63,1272.07 ; LED6.1@1400,1262.43 pad.25@1400,1320
LED7: LED7.1 pad.24 | length 109.2
  Top Layer w20: LED7.1@1290.37,1272.07 ccw(c1267.11,1295.32) 1300,1295.32 ccw(c1332.89,1295.32) LED7.1@1309.63,1272.07 ; LED7.1@1300,1262.43 pad.24@1300,1320
LED8: LED8.1 pad.23 | length 109.2
  Top Layer w20: LED8.1@1190.37,1272.07 ccw(c1167.11,1295.32) 1200,1295.32 ccw(c1232.89,1295.32) LED8.1@1209.63,1272.07 ; LED8.1@1200,1262.43 pad.23@1200,1320
MISO: pad.46 U1.12 | length 321.6
  Top Layer w10: U1.12@1914.17,1710.43 1957.57,1710.43 1968,1700 ; U1.12@1946.7,1708.54 cw(c1947.36,1679.36) 1968,1700 ; pad.46@1993.14,1524.49 cw(c1974.81,1506.15) pad.46@2000,1500 2000,1517.63 1968,1549.63 1968,1700
MOSI: pad.45 U1.13 | length 199
  Top Layer w10: U1.13@1914.17,1736.02 1960.98,1736.02 1984,1713 1984,1616 pad.45@2000,1600
NetLED1_2: LED1.2 R1.1 | length 219.6
  Top Layer w10: R1.1@2297.24,1137.43 2345.87,1137.43 LED1.2@2400,1191.57 ; 2361.49,1153.06 ccw(c2322.98,1191.57) LED1.2@2377.44,1191.57 ; 2370.99,1162.56 cw(c2396.06,1137.49) LED1.2@2396.06,1172.94 ; LED1.2@2378.56,1170.13 ccw(c2357.12,1191.57) LED1.2@2387.44,1191.57
NetLED2_2: LED2.2 R1.2 | length 265.1
  Top Layer w10: R1.2@2265.75,1137.43 2265.75,1157.31 ; R1.2@2268.62,1145.31 cw(c2304.55,1145.31) LED2.2@2279.15,1170.71 ; R1.2@2268.63,1152.5 cw(c2305.26,1131.35) LED2.2@2298.87,1173.16 ; 2270.99,1162.56 cw(c2296.06,1137.49) LED2.2@2296.06,1172.94 ; 2275.02,1163.58 ccw(c2248.58,1178.84) LED2.2@2278.08,1186.75 ; LED2.2@2277.52,1189.87 cw(c2236.93,1186.14) 2265.75,1157.32 ; LED2.2@2279.04,1170.52 cw(c2301.23,1157.71) LED2.2@2297.36,1183.04 ; LED2.2@2280.83,1172.4 ccw(c2264.55,1188.68) LED2.2@2287.48,1190.78 ; LED2.2@2300,1191.57 2265.75,1157.31
NetLED3_2: LED3.2 R1.3 | length 180.3
  Top Layer w10: LED3.2@2200,1191.57 2234.25,1157.31 ; LED3.2@2203.94,1172.94 cw(c2203.94,1137.49) 2229.01,1162.56 ; LED3.2@2212.52,1190.78 ccw(c2235.45,1188.68) LED3.2@2219.17,1172.4 ; LED3.2@2220.85,1170.71 cw(c2195.45,1145.31) R1.3@2231.38,1145.31 ; LED3.2@2222.48,1189.87 ccw(c2263.07,1186.14) 2234.25,1157.32 ; R1.3@2234.25,1137.43 2234.25,1157.31
NetLED4_2: LED4.2 R1.4 | length 219.6
  Top Layer w10: LED4.2@2100,1191.57 2154.13,1137.43 R1.4@2202.76,1137.43 ; LED4.2@2103.94,1172.94 cw(c2103.94,1137.49) 2129.01,1162.56 ; LED4.2@2112.56,1191.57 ccw(c2142.88,1191.57) LED4.2@2121.44,1170.13 ; LED4.2@2122.56,1191.57 ccw(c2177.02,1191.57) 2138.51,1153.06
NetLED5_2: LED5.2 R3.1 | length 220
  Top Layer w10: R3.1@1397.24,1136.43 1444.87,1136.43 LED5.2@1500,1191.57 ; 1461.49,1153.06 ccw(c1422.98,1191.57) LED5.2@1477.44,1191.57 ; 1470.99,1162.56 cw(c1496.06,1137.49) LED5.2@1496.06,1172.94 ; LED5.2@1478.56,1170.13 ccw(c1457.12,1191.57) LED5.2@1487.44,1191.57
NetLED6_2: LED6.2 R3.2 | length 153.1
  Top Layer w10: R3.2@1365.75,1136.43 1365.75,1157.31 ; 1370.99,1162.56 cw(c1396.06,1137.49) LED6.2@1396.06,1172.94 ; LED6.2@1377.52,1189.87 cw(c1336.92,1186.14) 1365.75,1157.32 ; LED6.2@1380.83,1172.4 ccw(c1364.55,1188.68) LED6.2@1387.48,1190.78 ; LED6.2@1400,1191.57 1365.75,1157.31
NetLED7_2: LED7.2 R3.3 | length 153.1
  Top Layer w10: LED7.2@1300,1191.57 1334.25,1157.31 ; LED7.2@1303.94,1172.94 cw(c1303.94,1137.49) 1329.01,1162.56 ; LED7.2@1312.52,1190.78 ccw(c1335.45,1188.68) LED7.2@1319.17,1172.4 ; LED7.2@1322.48,1189.87 ccw(c1363.07,1186.14) 1334.25,1157.32 ; R3.3@1334.25,1136.43 1334.25,1157.31
NetLED8_2: LED8.2 R3.4 | length 220
  Top Layer w10: LED8.2@1200,1191.57 1255.13,1136.43 R3.4@1302.76,1136.43 ; LED8.2@1203.94,1172.94 cw(c1203.94,1137.49) 1229.01,1162.56 ; LED8.2@1212.56,1191.57 ccw(c1242.88,1191.57) LED8.2@1221.44,1170.13 ; LED8.2@1222.56,1191.57 ccw(c1277.02,1191.57) 1238.51,1153.06
NRST: J1.8 pad.62@4700,4502 | length 1775.7
  Top Layer w6: J1.8@3246.06,4636.02 3246.06,4661.06 3413.28,4828.28 3502.79,4828.28 3527,4804.08 3527,4676.97 3538.97,4665 4480.23,4665 4682.23,4463 4686,4463 ; J1.8@3248.97,4655.71 cw(c3268.91,4655.71) 3254.81,4669.81
OSC_IN: pad.32 U1.2 | length 264.8
  Top Layer w10: pad.32@1600,2100 1635.46,2064.54 1635.46,1907.75 1653.64,1889.57 U1.2@1685.83,1889.57
OSC_OUT: pad.33 U1.3 | length 190.4
  Top Layer w10: pad.33@1600,2000 1619.46,1980.54 1619.46,1898.16 1653.64,1863.98 U1.3@1685.83,1863.98
PA0: J1.25 pad.62@2600,4502 | length 389.3
  Top Layer w6: 2625,4465 2626,4465 2626,4471.23 2651.77,4497 2732.82,4497 2744.32,4508.5 2813.53,4508.5 2911.42,4606.39 J1.25@2911.42,4636.02 ; J1.25@2909.36,4614.28 cw(c2904.4,4609.32) 2911.42,4609.32 cw(c2918.43,4609.32) J1.25@2913.47,4614.28
PA1: J1.34 pad.62@1700,4502 | length 1464.9
  Top Layer w6: 1700,4454.5 ccw(c1700,4475.02) 1714.51,4460.51 ; 1700,4460.5 ccw(c1700,4495.51) 1724.75,4470.75 ; 1700,4466.5 ccw(c1700,4515.99) pad.62@1735,4481 ; 1700,4472.5 ccw(c1700,4536.48) 1745.24,4491.24 ; pad.62@1700,4478.5 ccw(c1700,4556.96) 1755.48,4501.48 ; pad.62@1700,4484.5 ccw(c1700,4577.45) 1765.72,4511.72 ; 1704,4453 1707,4453 1860,4606 2489,4606 2570.67,4687.67 2590.44,4687.67 2603.77,4701 2714.7,4701 2734.25,4681.44 J1.34@2734.25,4636.02 ; J1.34@2732.2,4657.76 ccw(c2727.24,4662.72) 2734.25,4662.72 ccw(c2741.27,4662.72) J1.34@2736.31,4657.76
PA2: J1.33 pad.62@1600,4502 | length 1580
  Top Layer w6: 1600,4454.5 ccw(c1600,4475.02) 1614.51,4460.51 ; 1600,4460.5 ccw(c1600,4495.51) 1624.75,4470.75 ; 1600,4466.5 ccw(c1600,4515.99) pad.62@1635,4481 ; 1600,4472.5 ccw(c1600,4536.48) 1645.24,4491.24 ; pad.62@1600,4478.5 ccw(c1600,4556.96) 1655.48,4501.48 ; pad.62@1600,4484.5 ccw(c1600,4577.45) 1665.72,4511.72 ; 1614,4460 1772,4618 2484.03,4618 2565.7,4699.67 2585.47,4699.67 2598.8,4713 2719.67,4713 2753.94,4678.73 J1.33@2753.94,4636.02 ; J1.33@2751.88,4657.76 ccw(c2746.92,4662.72) 2753.94,4662.72 ccw(c2760.95,4662.72) J1.33@2755.99,4657.76
PA3: J1.32 pad.62@1500,4502 | length 1644.6
  Top Layer w6: 1500,4466.5 ccw(c1500,4515.99) pad.62@1535,4481 ; 1500,4472.5 ccw(c1500,4536.48) 1545.24,4491.24 ; pad.62@1500,4478.5 ccw(c1500,4556.96) 1555.48,4501.48 ; pad.62@1500,4484.5 ccw(c1500,4577.45) 1565.72,4511.72 ; 1528,4474 1684,4630 2479.06,4630 2560.73,4711.67 2580.5,4711.67 2593.83,4725 2724.64,4725 2773.62,4676.02 J1.32@2773.62,4636.02 ; J1.32@2771.57,4657.76 ccw(c2766.61,4662.72) 2773.62,4662.72 ccw(c2780.64,4662.72) J1.32@2775.68,4657.76